# EAGLE board MicroSD_Sniffer_Panel_v10 (EAGLE 7.2.0)
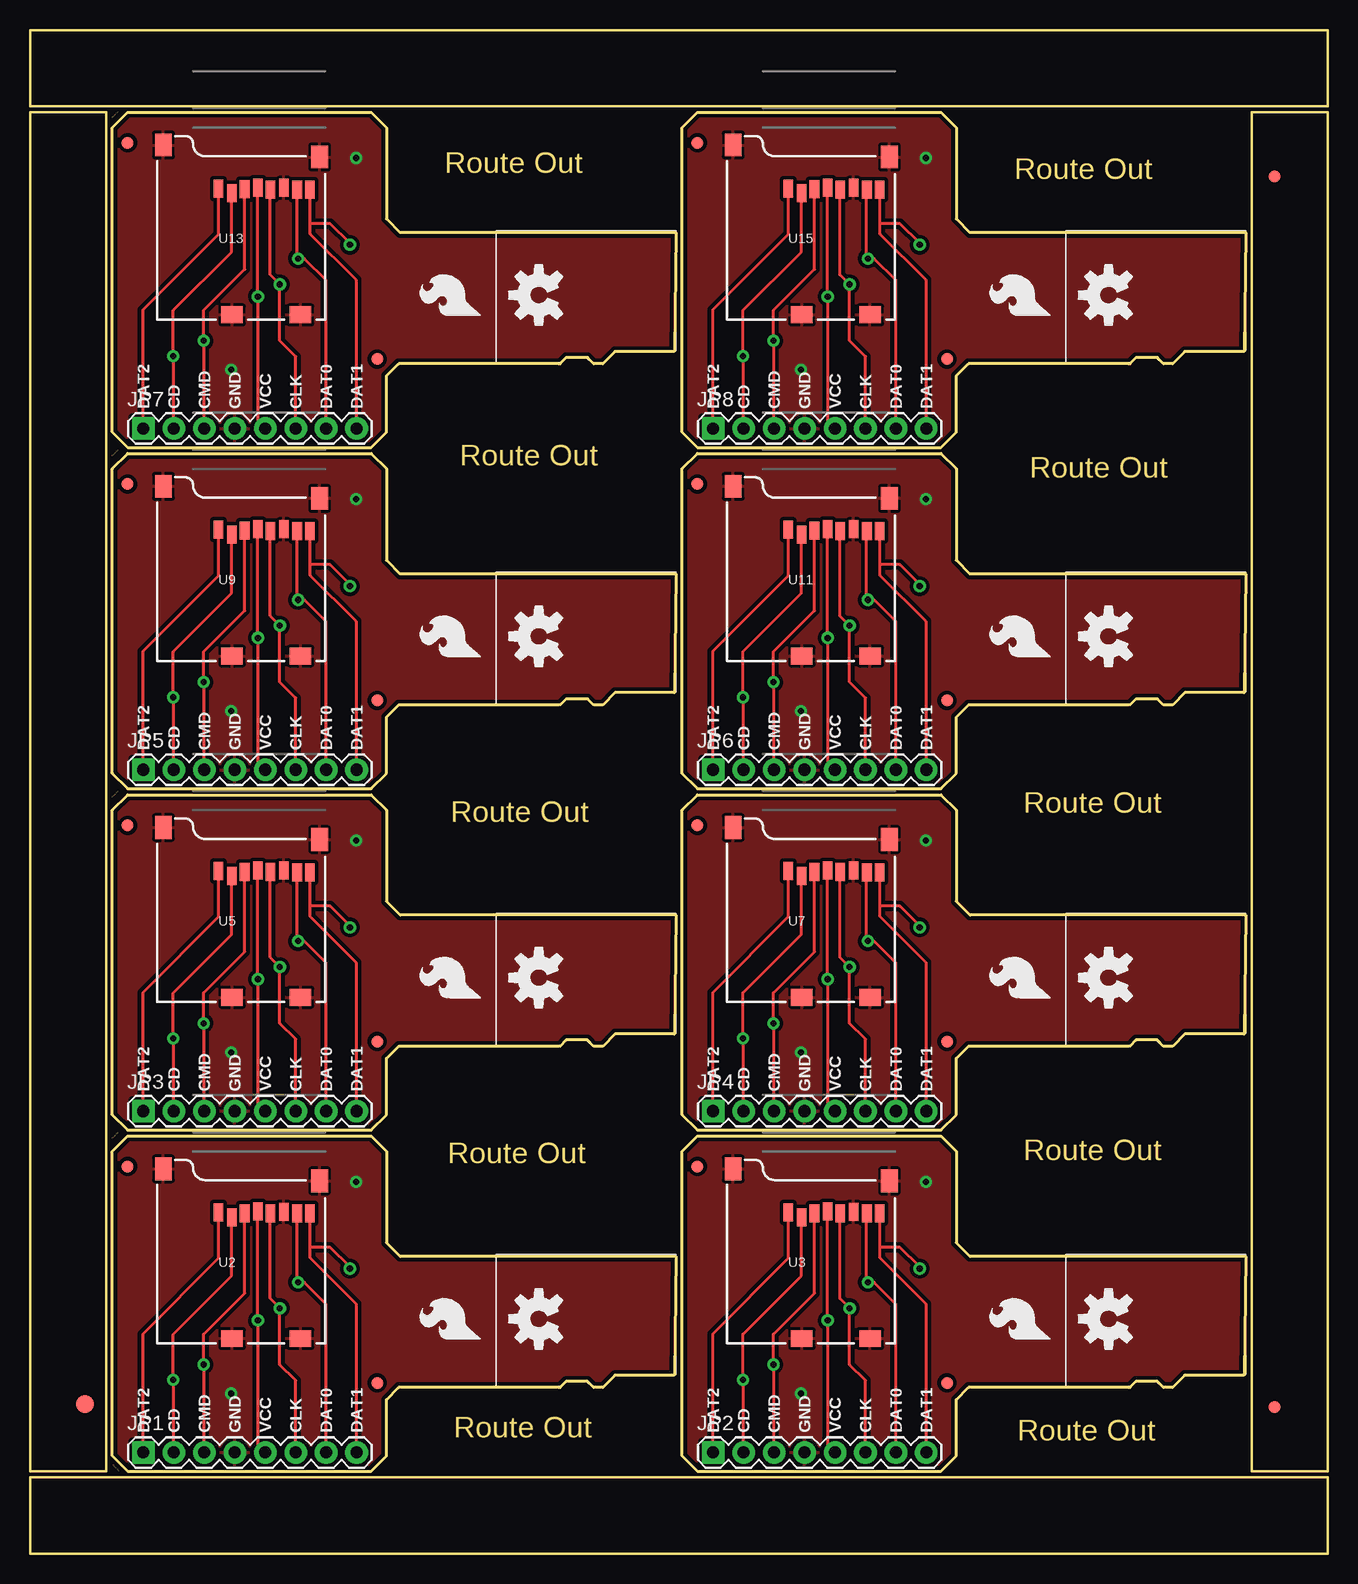
[diagram p0: board, top side]
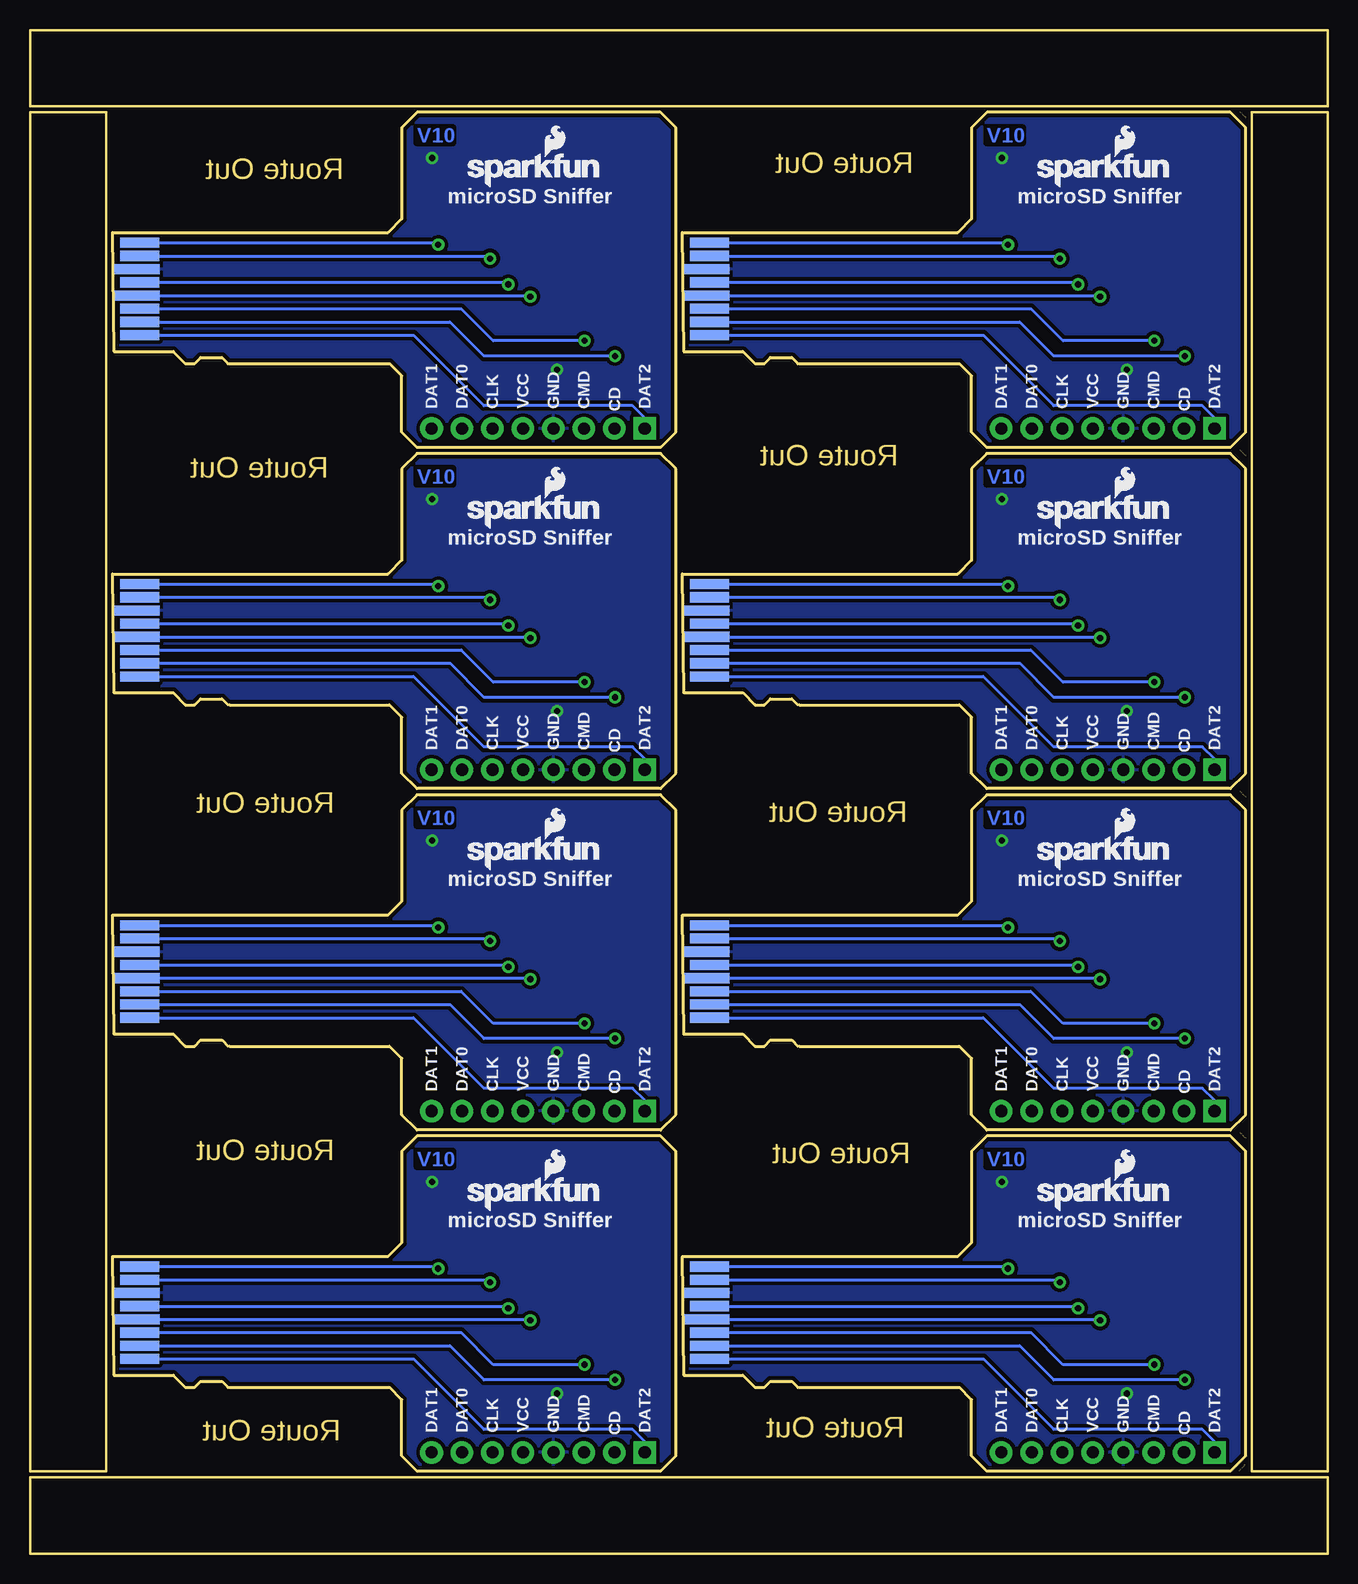
[diagram p1: board, bottom side, seen from below]

Size 108.2 x 127 mm. Coordinates in mm from the lower left corner, seen from the top.
Outline: 44.2,13.84 44.7,14.35 46.48,14.35 46.99,13.84 47.75,13.84 48.77,14.86 53.72,14.86 53.85,24.77 30.86,24.77 29.72,25.91 29.72,33.53 28.45,34.8 8.13,34.8 6.86,33.53 6.86,8.13 8.13,6.86 28.45,6.86 29.72,8.13 29.72,12.83 30.73,13.84 44.07,13.84
Outline: 91.69,13.84 92.2,14.35 93.98,14.35 94.49,13.84 95.25,13.84 96.27,14.86 101.22,14.86 101.35,24.77 78.36,24.77 77.22,25.91 77.22,33.53 75.95,34.8 55.63,34.8 54.36,33.53 54.36,8.13 55.63,6.86 75.95,6.86 77.22,8.13 77.22,12.83 78.23,13.84 91.57,13.84
Outline: 44.2,42.29 44.7,42.8 46.48,42.8 46.99,42.29 47.75,42.29 48.77,43.31 53.72,43.31 53.85,53.21 30.86,53.21 29.72,54.36 29.72,61.98 28.45,63.25 8.13,63.25 6.86,61.98 6.86,36.58 8.13,35.31 28.45,35.31 29.72,36.58 29.72,41.27 30.73,42.29 44.07,42.29
Outline: 91.69,42.29 92.2,42.8 93.98,42.8 94.49,42.29 95.25,42.29 96.27,43.31 101.22,43.31 101.35,53.21 78.36,53.21 77.22,54.36 77.22,61.98 75.95,63.25 55.63,63.25 54.36,61.98 54.36,36.58 55.63,35.31 75.95,35.31 77.22,36.58 77.22,41.27 78.23,42.29 91.57,42.29
Outline: 44.2,70.74 44.7,71.25 46.48,71.25 46.99,70.74 47.75,70.74 48.77,71.75 53.72,71.75 53.85,81.66 30.86,81.66 29.72,82.8 29.72,90.42 28.45,91.69 8.13,91.69 6.86,90.42 6.86,65.02 8.13,63.75 28.45,63.75 29.72,65.02 29.72,69.72 30.73,70.74 44.07,70.74
Outline: 91.69,70.74 92.2,71.25 93.98,71.25 94.49,70.74 95.25,70.74 96.27,71.75 101.22,71.75 101.35,81.66 78.36,81.66 77.22,82.8 77.22,90.42 75.95,91.69 55.63,91.69 54.36,90.42 54.36,65.02 55.63,63.75 75.95,63.75 77.22,65.02 77.22,69.72 78.23,70.74 91.57,70.74
Outline: 44.2,99.19 44.7,99.69 46.48,99.69 46.99,99.19 47.75,99.19 48.77,100.2 53.72,100.2 53.85,110.11 30.86,110.11 29.72,111.25 29.72,118.87 28.45,120.14 8.13,120.14 6.86,118.87 6.86,93.47 8.13,92.2 28.45,92.2 29.72,93.47 29.72,98.17 30.73,99.19 44.07,99.19
Outline: 91.69,99.19 92.2,99.69 93.98,99.69 94.49,99.19 95.25,99.19 96.27,100.2 101.22,100.2 101.35,110.11 78.36,110.11 77.22,111.25 77.22,118.87 75.95,120.14 55.63,120.14 54.36,118.87 54.36,93.47 55.63,92.2 75.95,92.2 77.22,93.47 77.22,98.17 78.23,99.19 91.57,99.19
Outline: 79.25,0 0,0 0,6.35 29.72,6.35
Outline: 28.96,6.35 108.2,6.35 108.2,0 78.49,0
Outline: 79.25,120.65 0,120.65 0,127 29.72,127
Outline: 28.45,127 108.2,127 108.2,120.65 77.98,120.65
Outline: 6.35,6.86 6.35,120.14 0,120.14 0,6.86 6.35,6.86
Outline: 108.2,6.86 108.2,120.14 101.85,120.14 101.85,6.86 108.2,6.86
Copper layers (1*16): Top 0.035mm / dielectric 1.5mm / Bottom 0.035mm
Design rules "SparkFun-2-layer": minimum track width 7mil, minimum drill 15mil, track to track 8mil, track to pad 8mil, pad to pad 8mil, via to via 8mil, smd to smd 8mil, copper to edge 8mil, drill to drill 8mil, minimum pad ring 12mil, minimum via ring 10mil, stop-mask expansion 4mil, vias tented up to drill 20mil, thermal gap 10mil

## Footprints (pad centres in the part's own frame; a part is rotated, then mirrored left to right if it is on the bottom)
FIDUCIAL-1.5X3 = smd 1.5 x 1.5: 1 0,0
FIDUCIAL-1X2 = smd 1 x 1: 1 0,0
1X08 = drill 1.016 pad 1.88 square: 1 0,0 | drill 1.016 pad 1.88: 2 2.54,0; 3 5.08,0; 4 7.62,0; 5 10.16,0; 6 12.7,0; 7 15.24,0; 8 17.78,0
MICRO-SDCARD = smd 0.85 x 3.25 bottom: CD/DAT3 2.56,2.3; CLK 5.86,2.3; CMD 3.66,2.3; DAT0 8.06,2.3; DAT1 9.16,2.3; DAT2 1.46,2.3 | smd 0.85 x 3.75 bottom: GND 6.96,2.1; VCC 4.76,2.1
MICROSD_1:1 = smd 0.8 x 1.5: 1 5.096,10.919; 2 6.218,10.519; 3 7.274,10.853; 4 8.367,10.982; 5 9.421,10.828; 6 10.539,10.973; 7 11.648,10.819; 8 12.721,10.819 | smd 1.8 x 1.4: CD1 11.92,0.4; CD2 6.22,0.4 | smd 1.4 x 1.9: GND1 0.497,14.55; GND3 13.52,13.55

## Placement (x,y rotation side)
E$1  [FIDUCIAL-1.5X3]  4.57,12.45 0 top
E$4  [FIDUCIAL-1X2]  103.76,12.19 0 top
E$8  [FIDUCIAL-1X2]  103.76,114.81 180 top
FID1  FIDUCIAL1X2  [FIDUCIAL-1X2]  8.13,32.26 0 top
FID2  FIDUCIAL1X2  [FIDUCIAL-1X2]  28.96,14.22 0 top
FID3  FIDUCIAL1X2  [FIDUCIAL-1X2]  55.63,32.26 0 top
FID4  FIDUCIAL1X2  [FIDUCIAL-1X2]  76.45,14.22 0 top
FID5  FIDUCIAL1X2  [FIDUCIAL-1X2]  8.13,60.71 0 top
FID6  FIDUCIAL1X2  [FIDUCIAL-1X2]  28.96,42.67 0 top
FID7  FIDUCIAL1X2  [FIDUCIAL-1X2]  55.63,60.71 0 top
FID8  FIDUCIAL1X2  [FIDUCIAL-1X2]  76.45,42.67 0 top
FID9  FIDUCIAL1X2  [FIDUCIAL-1X2]  8.13,89.15 0 top
FID10  FIDUCIAL1X2  [FIDUCIAL-1X2]  28.96,71.12 0 top
FID11  FIDUCIAL1X2  [FIDUCIAL-1X2]  55.63,89.15 0 top
FID12  FIDUCIAL1X2  [FIDUCIAL-1X2]  76.45,71.12 0 top
FID13  FIDUCIAL1X2  [FIDUCIAL-1X2]  8.13,117.6 0 top
FID14  FIDUCIAL1X2  [FIDUCIAL-1X2]  28.96,99.57 0 top
FID15  FIDUCIAL1X2  [FIDUCIAL-1X2]  55.63,117.6 0 top
FID16  FIDUCIAL1X2  [FIDUCIAL-1X2]  76.45,99.57 0 top
JP1  [1X08]  9.45,8.43 0 top
JP2  [1X08]  56.95,8.43 0 top
JP3  [1X08]  9.45,36.88 0 top
JP4  [1X08]  56.95,36.88 0 top
JP5  [1X08]  9.45,65.33 0 top
JP6  [1X08]  56.95,65.33 0 top
JP7  [1X08]  9.45,93.78 0 top
JP8  [1X08]  56.95,93.78 0 top
LOGO1  OSHW-LOGOM  [OSHW-LOGO-M]  42.42,19.56 90 top
LOGO2  SFE_LOGO_FLAME.2_INCH  [SFE_LOGO_FLAME_.2]  37.85,17.53 90 top
LOGO3  SFE_LOGO_NAME_FLAME.1_INCH  [SFE_LOGO_NAME_FLAME_.1]  24.64,28.45 0 bottom
LOGO4  OSHW-LOGOM  [OSHW-LOGO-M]  89.92,19.56 90 top
LOGO5  SFE_LOGO_FLAME.2_INCH  [SFE_LOGO_FLAME_.2]  85.34,17.53 90 top
LOGO6  SFE_LOGO_NAME_FLAME.1_INCH  [SFE_LOGO_NAME_FLAME_.1]  72.14,28.45 0 bottom
LOGO7  OSHW-LOGOM  [OSHW-LOGO-M]  42.42,48.01 90 top
LOGO8  SFE_LOGO_FLAME.2_INCH  [SFE_LOGO_FLAME_.2]  37.85,45.97 90 top
LOGO9  SFE_LOGO_NAME_FLAME.1_INCH  [SFE_LOGO_NAME_FLAME_.1]  24.64,56.9 0 bottom
LOGO10  OSHW-LOGOM  [OSHW-LOGO-M]  89.92,48.01 90 top
LOGO11  SFE_LOGO_FLAME.2_INCH  [SFE_LOGO_FLAME_.2]  85.34,45.97 90 top
LOGO12  SFE_LOGO_NAME_FLAME.1_INCH  [SFE_LOGO_NAME_FLAME_.1]  72.14,56.9 0 bottom
LOGO13  OSHW-LOGOM  [OSHW-LOGO-M]  42.42,76.45 90 top
LOGO14  SFE_LOGO_FLAME.2_INCH  [SFE_LOGO_FLAME_.2]  37.85,74.42 90 top
LOGO15  SFE_LOGO_NAME_FLAME.1_INCH  [SFE_LOGO_NAME_FLAME_.1]  24.64,85.34 0 bottom
LOGO16  OSHW-LOGOM  [OSHW-LOGO-M]  89.92,76.45 90 top
LOGO17  SFE_LOGO_FLAME.2_INCH  [SFE_LOGO_FLAME_.2]  85.34,74.42 90 top
LOGO18  SFE_LOGO_NAME_FLAME.1_INCH  [SFE_LOGO_NAME_FLAME_.1]  72.14,85.34 0 bottom
LOGO19  OSHW-LOGOM  [OSHW-LOGO-M]  42.42,104.9 90 top
LOGO20  SFE_LOGO_FLAME.2_INCH  [SFE_LOGO_FLAME_.2]  37.85,102.87 90 top
LOGO21  SFE_LOGO_NAME_FLAME.1_INCH  [SFE_LOGO_NAME_FLAME_.1]  24.64,113.79 0 bottom
LOGO22  OSHW-LOGOM  [OSHW-LOGO-M]  89.92,104.9 90 top
LOGO23  SFE_LOGO_FLAME.2_INCH  [SFE_LOGO_FLAME_.2]  85.34,102.87 90 top
LOGO24  SFE_LOGO_NAME_FLAME.1_INCH  [SFE_LOGO_NAME_FLAME_.1]  72.14,113.79 0 bottom
U1  MICRO-SDCARD  [MICRO-SDCARD]  53.85,14.76 90 top
U2  microSD Socket  [MICROSD_1:1]  10.62,17.52 0 top
U3  microSD Socket  [MICROSD_1:1]  58.12,17.52 0 top
U4  MICRO-SDCARD  [MICRO-SDCARD]  101.35,14.76 90 top
U5  microSD Socket  [MICROSD_1:1]  10.62,45.97 0 top
U6  MICRO-SDCARD  [MICRO-SDCARD]  53.85,43.21 90 top
U7  microSD Socket  [MICROSD_1:1]  58.12,45.97 0 top
U8  MICRO-SDCARD  [MICRO-SDCARD]  101.35,43.21 90 top
U9  microSD Socket  [MICROSD_1:1]  10.62,74.41 0 top
U10  MICRO-SDCARD  [MICRO-SDCARD]  53.85,71.65 90 top
U11  microSD Socket  [MICROSD_1:1]  58.12,74.41 0 top
U12  MICRO-SDCARD  [MICRO-SDCARD]  101.35,71.65 90 top
U13  microSD Socket  [MICROSD_1:1]  10.62,102.86 0 top
U14  MICRO-SDCARD  [MICRO-SDCARD]  53.85,100.1 90 top
U15  microSD Socket  [MICROSD_1:1]  58.12,102.86 0 top
U16  MICRO-SDCARD  [MICRO-SDCARD]  101.35,100.1 90 top

## Library data of the parts
E$1 = SparkFun-Retired
E$4 E$8 FID1-FID16 LOGO1-LOGO24 = SparkFun-Aesthetics
JP1-JP8 = SparkFun
U1 U4 U6 U8 U10 U12 U14 U16 = SparkFun-Boards
U2 U3 U5 U7 U9 U11 U13 U15 = SparkFun-Connectors; PROD_ID: CONN-07820

## Nets
CD/DAT1: JP2.2 U3.2 U4.CD/DAT3
CD/DAT2: JP3.2 U5.2 U6.CD/DAT3
CD/DAT3: JP1.2 U1.CD/DAT3 U2.2
CD/DAT4: JP4.2 U7.2 U8.CD/DAT3
CD/DAT5: JP5.2 U9.2 U10.CD/DAT3
CD/DAT6: JP6.2 U11.2 U12.CD/DAT3
CD/DAT7: JP7.2 U13.2 U14.CD/DAT3
CD/DAT8: JP8.2 U15.2 U16.CD/DAT3
CLK: JP1.6 U1.CLK U2.5
CLK1: JP2.6 U3.5 U4.CLK
CLK2: JP3.6 U5.5 U6.CLK
CLK3: JP4.6 U7.5 U8.CLK
CLK4: JP5.6 U9.5 U10.CLK
CLK5: JP6.6 U11.5 U12.CLK
CLK6: JP7.6 U13.5 U14.CLK
CLK7: JP8.6 U15.5 U16.CLK
CMD: JP1.3 U1.CMD U2.3
CMD1: JP2.3 U3.3 U4.CMD
CMD2: JP3.3 U5.3 U6.CMD
CMD3: JP4.3 U7.3 U8.CMD
CMD4: JP5.3 U9.3 U10.CMD
CMD5: JP6.3 U11.3 U12.CMD
CMD6: JP7.3 U13.3 U14.CMD
CMD7: JP8.3 U15.3 U16.CMD
DAT0: JP1.7 U1.DAT0 U2.7
DAT1: JP1.8 U1.DAT1 U2.8
DAT2: JP1.1 U1.DAT2 U2.1
DAT3: JP2.8 U3.8 U4.DAT1
DAT4: JP2.7 U3.7 U4.DAT0
DAT5: JP2.1 U3.1 U4.DAT2
DAT6: JP3.8 U5.8 U6.DAT1
DAT7: JP3.7 U5.7 U6.DAT0
DAT8: JP3.1 U5.1 U6.DAT2
DAT9: JP4.8 U7.8 U8.DAT1
DAT10: JP4.7 U7.7 U8.DAT0
DAT11: JP4.1 U7.1 U8.DAT2
DAT12: JP5.8 U9.8 U10.DAT1
DAT13: JP5.7 U9.7 U10.DAT0
DAT14: JP5.1 U9.1 U10.DAT2
DAT15: JP6.8 U11.8 U12.DAT1
DAT16: JP6.7 U11.7 U12.DAT0
DAT17: JP6.1 U11.1 U12.DAT2
DAT18: JP7.8 U13.8 U14.DAT1
DAT19: JP7.7 U13.7 U14.DAT0
DAT20: JP7.1 U13.1 U14.DAT2
DAT21: JP8.8 U15.8 U16.DAT1
DAT22: JP8.7 U15.7 U16.DAT0
DAT23: JP8.1 U15.1 U16.DAT2
GND: JP1.4 U1.GND U2.6 U2.CD1 U2.CD2 U2.GND1 U2.GND3
GND1: JP2.4 U3.6 U3.CD1 U3.CD2 U3.GND1 U3.GND3 U4.GND
GND2: JP3.4 U5.6 U5.CD1 U5.CD2 U5.GND1 U5.GND3 U6.GND
GND3: JP4.4 U7.6 U7.CD1 U7.CD2 U7.GND1 U7.GND3 U8.GND
GND4: JP5.4 U9.6 U9.CD1 U9.CD2 U9.GND1 U9.GND3 U10.GND
GND5: JP6.4 U11.6 U11.CD1 U11.CD2 U11.GND1 U11.GND3 U12.GND
GND6: JP7.4 U13.6 U13.CD1 U13.CD2 U13.GND1 U13.GND3 U14.GND
GND7: JP8.4 U15.6 U15.CD1 U15.CD2 U15.GND1 U15.GND3 U16.GND
VCC: JP1.5 U1.VCC U2.4
VCC1: JP2.5 U3.4 U4.VCC
VCC2: JP3.5 U5.4 U6.VCC
VCC3: JP4.5 U7.4 U8.VCC
VCC4: JP5.5 U9.4 U10.VCC
VCC5: JP6.5 U11.4 U12.VCC
VCC6: JP7.5 U13.4 U14.VCC
VCC7: JP8.5 U15.4 U16.VCC

## Tracks (layer width: path | path; a pad name or v marks a point on that pad's centre or on a via)
CD/DAT1  (via drill 0.51)
  Top 0.254: JP2.2 59.44,8.48 v59.44,14.48 59.44,18.29 64.3,23.15 64.3,28 U3.2
  Bottom 0.254: v59.44,14.48 70.36,14.48 73.2,17.32 U4.CD/DAT3
CD/DAT2  (via drill 0.51)
  Top 0.254: JP3.2 11.94,36.93 v11.94,42.93 11.94,46.74 16.8,51.6 16.8,56.44 U5.2
  Bottom 0.254: v11.94,42.93 22.86,42.93 25.7,45.77 U6.CD/DAT3
CD/DAT3  (via drill 0.51)
  Top 0.254: JP1.2 11.94,8.48 v11.94,14.48 11.94,18.29 16.8,23.15 16.8,28 U2.2
  Bottom 0.254: v11.94,14.48 22.86,14.48 25.7,17.32 U1.CD/DAT3
CD/DAT4  (via drill 0.51)
  Top 0.254: JP4.2 59.44,36.93 v59.44,42.93 59.44,46.74 64.3,51.6 64.3,56.44 U7.2
  Bottom 0.254: v59.44,42.93 70.36,42.93 73.2,45.77 U8.CD/DAT3
CD/DAT5  (via drill 0.51)
  Top 0.254: JP5.2 11.94,65.38 v11.94,71.37 11.94,75.18 16.8,80.04 16.8,84.89 U9.2
  Bottom 0.254: v11.94,71.37 22.86,71.37 25.7,74.21 U10.CD/DAT3
CD/DAT6  (via drill 0.51)
  Top 0.254: JP6.2 59.44,65.38 v59.44,71.37 59.44,75.18 64.3,80.04 64.3,84.89 U11.2
  Bottom 0.254: v59.44,71.37 70.36,71.37 73.2,74.21 U12.CD/DAT3
CD/DAT7  (via drill 0.51)
  Top 0.254: JP7.2 11.94,93.83 v11.94,99.82 11.94,103.63 16.8,108.49 16.8,113.34 U13.2
  Bottom 0.254: v11.94,99.82 22.86,99.82 25.7,102.66 U14.CD/DAT3
CD/DAT8  (via drill 0.51)
  Top 0.254: JP8.2 59.44,93.83 v59.44,99.82 59.44,103.63 64.3,108.49 64.3,113.34 U15.2
  Bottom 0.254: v59.44,99.82 70.36,99.82 73.2,102.66 U16.CD/DAT3
CLK  (via drill 0.51)
  Top 0.254: v20.83,20.45 20.83,15.75 22.15,14.43 JP1.6 | v20.83,20.45 20.83,20.83 | v20.83,20.45 20.02,21.25 20.02,28.33 U2.5
  Bottom 0.254: v20.83,20.45 20.85,20.46 | 20.94,20.34 v20.83,20.45 | U1.CLK 21,20.62 v20.83,20.45
CLK1  (via drill 0.51)
  Top 0.254: v68.33,20.45 68.33,15.75 69.65,14.43 JP2.6 | v68.33,20.45 68.33,20.83 | v68.33,20.45 67.52,21.25 67.52,28.33 U3.5
  Bottom 0.254: v68.33,20.45 68.34,20.46 | 68.44,20.34 v68.33,20.45 | U4.CLK 68.5,20.62 v68.33,20.45
CLK2  (via drill 0.51)
  Top 0.254: v20.83,48.9 20.83,44.2 22.15,42.88 JP3.6 | v20.83,48.9 20.83,49.28 | v20.83,48.9 20.02,49.7 20.02,56.77 U5.5
  Bottom 0.254: v20.83,48.9 20.85,48.91 | 20.94,48.79 v20.83,48.9 | U6.CLK 21,49.06 v20.83,48.9
CLK3  (via drill 0.51)
  Top 0.254: v68.33,48.9 68.33,44.2 69.65,42.88 JP4.6 | v68.33,48.9 68.33,49.28 | v68.33,48.9 67.52,49.7 67.52,56.77 U7.5
  Bottom 0.254: v68.33,48.9 68.34,48.91 | 68.44,48.79 v68.33,48.9 | U8.CLK 68.5,49.06 v68.33,48.9
CLK4  (via drill 0.51)
  Top 0.254: v20.83,77.34 20.83,72.64 22.15,71.32 JP5.6 | v20.83,77.34 20.83,77.72 | v20.83,77.34 20.02,78.15 20.02,85.22 U9.5
  Bottom 0.254: v20.83,77.34 20.85,77.36 | 20.94,77.23 v20.83,77.34 | U10.CLK 21,77.51 v20.83,77.34
CLK5  (via drill 0.51)
  Top 0.254: v68.33,77.34 68.33,72.64 69.65,71.32 JP6.6 | v68.33,77.34 68.33,77.72 | v68.33,77.34 67.52,78.15 67.52,85.22 U11.5
  Bottom 0.254: v68.33,77.34 68.34,77.36 | 68.44,77.23 v68.33,77.34 | U12.CLK 68.5,77.51 v68.33,77.34
CLK6  (via drill 0.51)
  Top 0.254: v20.83,105.79 20.83,101.09 22.15,99.77 JP7.6 | v20.83,105.79 20.83,106.17 | v20.83,105.79 20.02,106.6 20.02,113.67 U13.5
  Bottom 0.254: v20.83,105.79 20.85,105.81 | 20.94,105.68 v20.83,105.79 | U14.CLK 21,105.96 v20.83,105.79
CLK7  (via drill 0.51)
  Top 0.254: v68.33,105.79 68.33,101.09 69.65,99.77 JP8.6 | v68.33,105.79 68.33,106.17 | v68.33,105.79 67.52,106.6 67.52,113.67 U15.5
  Bottom 0.254: v68.33,105.79 68.34,105.81 | 68.44,105.68 v68.33,105.79 | U16.CLK 68.5,105.96 v68.33,105.79
CMD  (via drill 0.51)
  Top 0.254: JP1.3 14.48,8.48 v14.48,15.75 14.48,18.29 17.9,21.71 U2.3
  Bottom 0.254: v14.48,15.75 22.1,15.75 24.77,18.42 U1.CMD
CMD1  (via drill 0.51)
  Top 0.254: JP2.3 61.98,8.48 v61.98,15.75 61.98,18.29 65.4,21.71 U3.3
  Bottom 0.254: v61.98,15.75 69.6,15.75 72.27,18.42 U4.CMD
CMD2  (via drill 0.51)
  Top 0.254: JP3.3 14.48,36.93 v14.48,44.2 14.48,46.74 17.9,50.16 U5.3
  Bottom 0.254: v14.48,44.2 22.1,44.2 24.77,46.87 U6.CMD
CMD3  (via drill 0.51)
  Top 0.254: JP4.3 61.98,36.93 v61.98,44.2 61.98,46.74 65.4,50.16 U7.3
  Bottom 0.254: v61.98,44.2 69.6,44.2 72.27,46.87 U8.CMD
CMD4  (via drill 0.51)
  Top 0.254: JP5.3 14.48,65.38 v14.48,72.64 14.48,75.18 17.9,78.6 U9.3
  Bottom 0.254: v14.48,72.64 22.1,72.64 24.77,75.31 U10.CMD
CMD5  (via drill 0.51)
  Top 0.254: JP6.3 61.98,65.38 v61.98,72.64 61.98,75.18 65.4,78.6 U11.3
  Bottom 0.254: v61.98,72.64 69.6,72.64 72.27,75.31 U12.CMD
CMD6  (via drill 0.51)
  Top 0.254: JP7.3 14.48,93.83 v14.48,101.09 14.48,103.63 17.9,107.05 U13.3
  Bottom 0.254: v14.48,101.09 22.1,101.09 24.77,103.76 U14.CMD
CMD7  (via drill 0.51)
  Top 0.254: JP8.3 61.98,93.83 v61.98,101.09 61.98,103.63 65.4,107.05 U15.3
  Bottom 0.254: v61.98,101.09 69.6,101.09 72.27,103.76 U16.CMD
DAT0  (via drill 0.51)
  Top 0.254: v22.35,22.61 22.3,22.66 | v22.35,22.61 22.86,22.61 24.64,20.83 24.64,8.48 JP1.7 | v22.35,22.61 22.25,22.71 22.25,28.32 U2.7
  Bottom 0.254: v22.35,22.61 22.41,22.66 | 22.42,22.54 v22.35,22.61 | U1.DAT0 22.56,22.82 v22.35,22.61
DAT1  (via drill 0.51)
  Top 0.254: JP1.8 27.18,8.48 27.18,20.83 23.37,24.64 23.37,25.53 | 23.37,25.53 23.37,28.31 U2.8 | v26.67,23.75 26.67,23.88 25.02,25.53 23.37,25.53
  Bottom 0.254: 26.69,23.77 v26.67,23.75 26.84,23.92 U1.DAT1
DAT2
  Top 0.254: JP1.1 9.4,8.48 9.4,18.29 15.75,24.64 15.75,28.41 U2.1
  Bottom 0.254: JP1.1 9.45,9.32 10.46,10.34 22.86,10.34 28.74,16.22 U1.DAT2
DAT3  (via drill 0.51)
  Top 0.254: JP2.8 74.68,8.48 74.68,20.83 70.87,24.64 70.87,25.53 | 70.87,25.53 70.87,28.31 U3.8 | v74.17,23.75 74.17,23.88 72.52,25.53 70.87,25.53
  Bottom 0.254: 74.18,23.77 v74.17,23.75 74.34,23.92 U4.DAT1
DAT4  (via drill 0.51)
  Top 0.254: v69.85,22.61 69.8,22.66 | v69.85,22.61 70.36,22.61 72.14,20.83 72.14,8.48 JP2.7 | v69.85,22.61 69.75,22.71 69.75,28.32 U3.7
  Bottom 0.254: v69.85,22.61 69.91,22.66 | 69.92,22.54 v69.85,22.61 | U4.DAT0 70.06,22.82 v69.85,22.61
DAT5
  Top 0.254: JP2.1 56.9,8.48 56.9,18.29 63.25,24.64 63.25,28.41 U3.1
  Bottom 0.254: JP2.1 56.95,9.32 57.96,10.34 70.36,10.34 76.24,16.22 U4.DAT2
DAT6  (via drill 0.51)
  Top 0.254: JP3.8 27.18,36.93 27.18,49.28 23.37,53.09 23.37,53.98 | 23.37,53.98 23.37,56.76 U5.8 | v26.67,52.2 26.67,52.32 25.02,53.98 23.37,53.98
  Bottom 0.254: 26.69,52.21 v26.67,52.2 26.84,52.37 U6.DAT1
DAT7  (via drill 0.51)
  Top 0.254: v22.35,51.05 22.3,51.11 | v22.35,51.05 22.86,51.05 24.64,49.28 24.64,36.93 JP3.7 | v22.35,51.05 22.25,51.16 22.25,56.77 U5.7
  Bottom 0.254: v22.35,51.05 22.41,51.11 | 22.42,50.99 v22.35,51.05 | U6.DAT0 22.56,51.27 v22.35,51.05
DAT8
  Top 0.254: JP3.1 9.4,36.93 9.4,46.74 15.75,53.09 15.75,56.86 U5.1
  Bottom 0.254: JP3.1 9.45,37.77 10.46,38.79 22.86,38.79 28.74,44.66 U6.DAT2
DAT9  (via drill 0.51)
  Top 0.254: JP4.8 74.68,36.93 74.68,49.28 70.87,53.09 70.87,53.98 | 70.87,53.98 70.87,56.76 U7.8 | v74.17,52.2 74.17,52.32 72.52,53.98 70.87,53.98
  Bottom 0.254: 74.18,52.21 v74.17,52.2 74.34,52.37 U8.DAT1
DAT10  (via drill 0.51)
  Top 0.254: v69.85,51.05 69.8,51.11 | v69.85,51.05 70.36,51.05 72.14,49.28 72.14,36.93 JP4.7 | v69.85,51.05 69.75,51.16 69.75,56.77 U7.7
  Bottom 0.254: v69.85,51.05 69.91,51.11 | 69.92,50.99 v69.85,51.05 | U8.DAT0 70.06,51.27 v69.85,51.05
DAT11
  Top 0.254: JP4.1 56.9,36.93 56.9,46.74 63.25,53.09 63.25,56.86 U7.1
  Bottom 0.254: JP4.1 56.95,37.77 57.96,38.79 70.36,38.79 76.24,44.66 U8.DAT2
DAT12  (via drill 0.51)
  Top 0.254: JP5.8 27.18,65.38 27.18,77.72 23.37,81.53 23.37,82.42 | 23.37,82.42 23.37,85.21 U9.8 | v26.67,80.64 26.67,80.77 25.02,82.42 23.37,82.42
  Bottom 0.254: 26.69,80.66 v26.67,80.64 26.84,80.81 U10.DAT1
DAT13  (via drill 0.51)
  Top 0.254: v22.35,79.5 22.3,79.56 | v22.35,79.5 22.86,79.5 24.64,77.72 24.64,65.38 JP5.7 | v22.35,79.5 22.25,79.6 22.25,85.21 U9.7
  Bottom 0.254: v22.35,79.5 22.41,79.56 | 22.42,79.43 v22.35,79.5 | U10.DAT0 22.56,79.71 v22.35,79.5
DAT14
  Top 0.254: JP5.1 9.4,65.38 9.4,75.18 15.75,81.53 15.75,85.3 U9.1
  Bottom 0.254: JP5.1 9.45,66.22 10.46,67.23 22.86,67.23 28.74,73.11 U10.DAT2
DAT15  (via drill 0.51)
  Top 0.254: JP6.8 74.68,65.38 74.68,77.72 70.87,81.53 70.87,82.42 | 70.87,82.42 70.87,85.21 U11.8 | v74.17,80.64 74.17,80.77 72.52,82.42 70.87,82.42
  Bottom 0.254: 74.18,80.66 v74.17,80.64 74.34,80.81 U12.DAT1
DAT16  (via drill 0.51)
  Top 0.254: v69.85,79.5 69.8,79.56 | v69.85,79.5 70.36,79.5 72.14,77.72 72.14,65.38 JP6.7 | v69.85,79.5 69.75,79.6 69.75,85.21 U11.7
  Bottom 0.254: v69.85,79.5 69.91,79.56 | 69.92,79.43 v69.85,79.5 | U12.DAT0 70.06,79.71 v69.85,79.5
DAT17
  Top 0.254: JP6.1 56.9,65.38 56.9,75.18 63.25,81.53 63.25,85.3 U11.1
  Bottom 0.254: JP6.1 56.95,66.22 57.96,67.23 70.36,67.23 76.24,73.11 U12.DAT2
DAT18  (via drill 0.51)
  Top 0.254: JP7.8 27.18,93.83 27.18,106.17 23.37,109.98 23.37,110.87 | 23.37,110.87 23.37,113.66 U13.8 | v26.67,109.09 26.67,109.22 25.02,110.87 23.37,110.87
  Bottom 0.254: 26.69,109.11 v26.67,109.09 26.84,109.26 U14.DAT1
DAT19  (via drill 0.51)
  Top 0.254: v22.35,107.95 22.3,108 | v22.35,107.95 22.86,107.95 24.64,106.17 24.64,93.83 JP7.7 | v22.35,107.95 22.25,108.05 22.25,113.66 U13.7
  Bottom 0.254: v22.35,107.95 22.41,108.01 | 22.42,107.88 v22.35,107.95 | U14.DAT0 22.56,108.16 v22.35,107.95
DAT20
  Top 0.254: JP7.1 9.4,93.83 9.4,103.63 15.75,109.98 15.75,113.75 U13.1
  Bottom 0.254: JP7.1 9.45,94.67 10.46,95.68 22.86,95.68 28.74,101.56 U14.DAT2
DAT21  (via drill 0.51)
  Top 0.254: JP8.8 74.68,93.83 74.68,106.17 70.87,109.98 70.87,110.87 | 70.87,110.87 70.87,113.66 U15.8 | v74.17,109.09 74.17,109.22 72.52,110.87 70.87,110.87
  Bottom 0.254: 74.18,109.11 v74.17,109.09 74.34,109.26 U16.DAT1
DAT22  (via drill 0.51)
  Top 0.254: v69.85,107.95 69.8,108 | v69.85,107.95 70.36,107.95 72.14,106.17 72.14,93.83 JP8.7 | v69.85,107.95 69.75,108.05 69.75,113.66 U15.7
  Bottom 0.254: v69.85,107.95 69.91,108.01 | 69.92,107.88 v69.85,107.95 | U16.DAT0 70.06,108.16 v69.85,107.95
DAT23
  Top 0.254: JP8.1 56.9,93.83 56.9,103.63 63.25,109.98 63.25,113.75 U15.1
  Bottom 0.254: JP8.1 56.95,94.67 57.96,95.68 70.36,95.68 76.24,101.56 U16.DAT2
GND  (via drill 0.51)
  other vias: 27.18,30.99 16.76,13.34
  pour Top (isolate 0.305): 30.73,13.84 29.72,12.83 29.72,8.13 28.45,6.86 8.13,6.86 6.86,8.13 6.86,33.53 8.13,34.8 28.45,34.8 29.72,33.53 29.72,25.91 30.86,24.77 53.85,24.77 53.85,14.86 48.64,14.86 47.75,13.97 46.86,13.97 46.35,14.48 44.83,14.48 44.2,13.84
  pour Bottom (isolate 0.305): 53.85,24.77 30.86,24.77 29.72,25.91 29.72,33.53 28.45,34.8 8.13,34.8 6.86,33.53 6.86,8.13 8.13,6.86 28.45,6.86 29.72,8.13 29.72,12.83 29.84,12.95 30.83,13.84 44.32,13.84 44.7,14.22 46.23,14.22 46.86,13.84 47.88,13.84 48.77,14.73 53.72,14.86
GND1  (via drill 0.51)
  other vias: 74.68,30.99 64.26,13.34
  pour Top (isolate 0.305): 78.23,13.84 77.22,12.83 77.22,8.13 75.95,6.86 55.63,6.86 54.36,8.13 54.36,33.53 55.63,34.8 75.95,34.8 77.22,33.53 77.22,25.91 78.36,24.77 101.35,24.77 101.35,14.86 96.14,14.86 95.25,13.97 94.36,13.97 93.85,14.48 92.33,14.48 91.69,13.84
  pour Bottom (isolate 0.305): 101.35,24.77 78.36,24.77 77.22,25.91 77.22,33.53 75.95,34.8 55.63,34.8 54.36,33.53 54.36,8.13 55.63,6.86 75.95,6.86 77.22,8.13 77.22,12.83 77.34,12.95 78.33,13.84 91.82,13.84 92.2,14.22 93.73,14.22 94.36,13.84 95.38,13.84 96.27,14.73 101.22,14.86
GND2  (via drill 0.51)
  other vias: 27.18,59.44 16.76,41.78
  pour Top (isolate 0.305): 30.73,42.29 29.72,41.27 29.72,36.58 28.45,35.31 8.13,35.31 6.86,36.58 6.86,61.98 8.13,63.25 28.45,63.25 29.72,61.98 29.72,54.36 30.86,53.21 53.85,53.21 53.85,43.31 48.64,43.31 47.75,42.42 46.86,42.42 46.35,42.93 44.83,42.93 44.2,42.29
  pour Bottom (isolate 0.305): 53.85,53.21 30.86,53.21 29.72,54.36 29.72,61.98 28.45,63.25 8.13,63.25 6.86,61.98 6.86,36.58 8.13,35.31 28.45,35.31 29.72,36.58 29.72,41.27 29.84,41.4 30.83,42.29 44.32,42.29 44.7,42.67 46.23,42.67 46.86,42.29 47.88,42.29 48.77,43.18 53.72,43.31
GND3  (via drill 0.51)
  other vias: 74.68,59.44 64.26,41.78
  pour Top (isolate 0.305): 78.23,42.29 77.22,41.27 77.22,36.58 75.95,35.31 55.63,35.31 54.36,36.58 54.36,61.98 55.63,63.25 75.95,63.25 77.22,61.98 77.22,54.36 78.36,53.21 101.35,53.21 101.35,43.31 96.14,43.31 95.25,42.42 94.36,42.42 93.85,42.93 92.33,42.93 91.69,42.29
  pour Bottom (isolate 0.305): 101.35,53.21 78.36,53.21 77.22,54.36 77.22,61.98 75.95,63.25 55.63,63.25 54.36,61.98 54.36,36.58 55.63,35.31 75.95,35.31 77.22,36.58 77.22,41.27 77.34,41.4 78.33,42.29 91.82,42.29 92.2,42.67 93.73,42.67 94.36,42.29 95.38,42.29 96.27,43.18 101.22,43.31
GND4  (via drill 0.51)
  other vias: 27.18,87.88 16.76,70.23
  pour Top (isolate 0.305): 30.73,70.74 29.72,69.72 29.72,65.02 28.45,63.75 8.13,63.75 6.86,65.02 6.86,90.42 8.13,91.69 28.45,91.69 29.72,90.42 29.72,82.8 30.86,81.66 53.85,81.66 53.85,71.75 48.64,71.75 47.75,70.87 46.86,70.87 46.35,71.37 44.83,71.37 44.2,70.74
  pour Bottom (isolate 0.305): 53.85,81.66 30.86,81.66 29.72,82.8 29.72,90.42 28.45,91.69 8.13,91.69 6.86,90.42 6.86,65.02 8.13,63.75 28.45,63.75 29.72,65.02 29.72,69.72 29.84,69.85 30.83,70.74 44.32,70.74 44.7,71.12 46.23,71.12 46.86,70.74 47.88,70.74 48.77,71.63 53.72,71.75
GND5  (via drill 0.51)
  other vias: 74.68,87.88 64.26,70.23
  pour Top (isolate 0.305): 78.23,70.74 77.22,69.72 77.22,65.02 75.95,63.75 55.63,63.75 54.36,65.02 54.36,90.42 55.63,91.69 75.95,91.69 77.22,90.42 77.22,82.8 78.36,81.66 101.35,81.66 101.35,71.75 96.14,71.75 95.25,70.87 94.36,70.87 93.85,71.37 92.33,71.37 91.69,70.74
  pour Bottom (isolate 0.305): 101.35,81.66 78.36,81.66 77.22,82.8 77.22,90.42 75.95,91.69 55.63,91.69 54.36,90.42 54.36,65.02 55.63,63.75 75.95,63.75 77.22,65.02 77.22,69.72 77.34,69.85 78.33,70.74 91.82,70.74 92.2,71.12 93.73,71.12 94.36,70.74 95.38,70.74 96.27,71.63 101.22,71.75
GND6  (via drill 0.51)
  other vias: 27.18,116.33 16.76,98.68
  pour Top (isolate 0.305): 30.73,99.19 29.72,98.17 29.72,93.47 28.45,92.2 8.13,92.2 6.86,93.47 6.86,118.87 8.13,120.14 28.45,120.14 29.72,118.87 29.72,111.25 30.86,110.11 53.85,110.11 53.85,100.2 48.64,100.2 47.75,99.31 46.86,99.31 46.35,99.82 44.83,99.82 44.2,99.19
  pour Bottom (isolate 0.305): 53.85,110.11 30.86,110.11 29.72,111.25 29.72,118.87 28.45,120.14 8.13,120.14 6.86,118.87 6.86,93.47 8.13,92.2 28.45,92.2 29.72,93.47 29.72,98.17 29.84,98.3 30.83,99.19 44.32,99.19 44.7,99.57 46.23,99.57 46.86,99.19 47.88,99.19 48.77,100.08 53.72,100.2
GND7  (via drill 0.51)
  other vias: 74.68,116.33 64.26,98.68
  pour Top (isolate 0.305): 78.23,99.19 77.22,98.17 77.22,93.47 75.95,92.2 55.63,92.2 54.36,93.47 54.36,118.87 55.63,120.14 75.95,120.14 77.22,118.87 77.22,111.25 78.36,110.11 101.35,110.11 101.35,100.2 96.14,100.2 95.25,99.31 94.36,99.31 93.85,99.82 92.33,99.82 91.69,99.19
  pour Bottom (isolate 0.305): 101.35,110.11 78.36,110.11 77.22,111.25 77.22,118.87 75.95,120.14 55.63,120.14 54.36,118.87 54.36,93.47 55.63,92.2 75.95,92.2 77.22,93.47 77.22,98.17 77.34,98.3 78.33,99.19 91.82,99.19 92.2,99.57 93.73,99.57 94.36,99.19 95.38,99.19 96.27,100.08 101.22,100.2
VCC  (via drill 0.51)
  Top 0.254: 19.05,8.99 JP1.5 19,9.04 v19,19.43 U2.4
  Bottom 0.254: 19.06,19.36 v19,19.43 19.08,19.52 U1.VCC
VCC1  (via drill 0.51)
  Top 0.254: 66.55,8.99 JP2.5 66.5,9.04 v66.5,19.43 U3.4
  Bottom 0.254: 66.56,19.36 v66.5,19.43 66.58,19.52 U4.VCC
VCC2  (via drill 0.51)
  Top 0.254: 19.05,37.44 JP3.5 19,37.49 v19,47.88 U5.4
  Bottom 0.254: 19.06,47.81 v19,47.88 19.08,47.97 U6.VCC
VCC3  (via drill 0.51)
  Top 0.254: 66.55,37.44 JP4.5 66.5,37.49 v66.5,47.88 U7.4
  Bottom 0.254: 66.56,47.81 v66.5,47.88 66.58,47.97 U8.VCC
VCC4  (via drill 0.51)
  Top 0.254: 19.05,65.89 JP5.5 19,65.94 v19,76.33 19,85.39 U9.4
  Bottom 0.254: 19.06,76.26 v19,76.33 19.08,76.41 U10.VCC
VCC5  (via drill 0.51)
  Top 0.254: 66.55,65.89 JP6.5 66.5,65.94 v66.5,76.33 66.5,85.39 U11.4
  Bottom 0.254: 66.56,76.26 v66.5,76.33 66.58,76.41 U12.VCC
VCC6  (via drill 0.51)
  Top 0.254: 19.05,94.34 JP7.5 19,94.39 v19,104.78 U13.4
  Bottom 0.254: 19.06,104.71 v19,104.78 19.08,104.86 U14.VCC
VCC7  (via drill 0.51)
  Top 0.254: 66.55,94.34 JP8.5 66.5,94.39 v66.5,104.78 U15.4
  Bottom 0.254: 66.56,104.71 v66.5,104.78 66.58,104.86 U16.VCC

## Text on the board
Bottom: V10 | V10 | V10 | V10 | V10 | V10 | V10 | V10
Dimension: Route Out | Route Out | Route Out | Route Out | Route Out | Route Out | Route Out | Route Out | Route Out | Route Out | Route Out | Route Out | Route Out | Route Out | Route Out
tPlace: DAT2 | CD | CMD | GND | VCC | CLK | DAT0 | DAT1 | DAT2 | CD | CMD | GND | VCC | CLK | DAT0 | DAT1 | DAT2 | CD | CMD | GND | VCC | CLK | DAT0 | DAT1 | DAT2 | CD | CMD | GND | VCC | CLK | DAT0 | DAT1 | DAT2 | CD | CMD | GND | VCC | CLK | DAT0 | DAT1 | DAT2 | CD | CMD | GND | VCC | CLK | DAT0 | DAT1 | DAT2 | CD | CMD | GND | VCC | CLK | DAT0 | DAT1 | DAT2 | CD | CMD | GND | VCC | CLK | DAT0 | DAT1
bPlace: microSD Sniffer | microSD Sniffer | CD | CD | DAT2 | CMD | GND | VCC | CLK | DAT0 | DAT1 | DAT2 | CMD | GND | VCC | CLK | DAT0 | DAT1 | microSD Sniffer | microSD Sniffer | CD | CD | DAT2 | CMD | GND | VCC | CLK | DAT0 | DAT1 | DAT2 | CMD | GND | VCC | CLK | DAT0 | DAT1 | microSD Sniffer | microSD Sniffer | CD | CD | DAT2 | CMD | GND | VCC | CLK | DAT0 | DAT1 | DAT2 | CMD | GND | VCC | CLK | DAT0 | DAT1 | microSD Sniffer | microSD Sniffer | CD | CD | DAT2 | CMD | GND | VCC | CLK | DAT0 | DAT1 | DAT2 | CMD | GND | VCC | CLK | DAT0 | DAT1